# Altium PCB rightsuperior.PcbDoc
Units mil, origin at the board's own origin, x right, y up, seen from the top; angles counter-clockwise.
Board outline 1107.87 x 984.25 mil, 2 copper layers (Top Layer, Bottom Layer), stack 30.8 mil thick; 3 components, 6 nets, 47 pads, 14 vias.
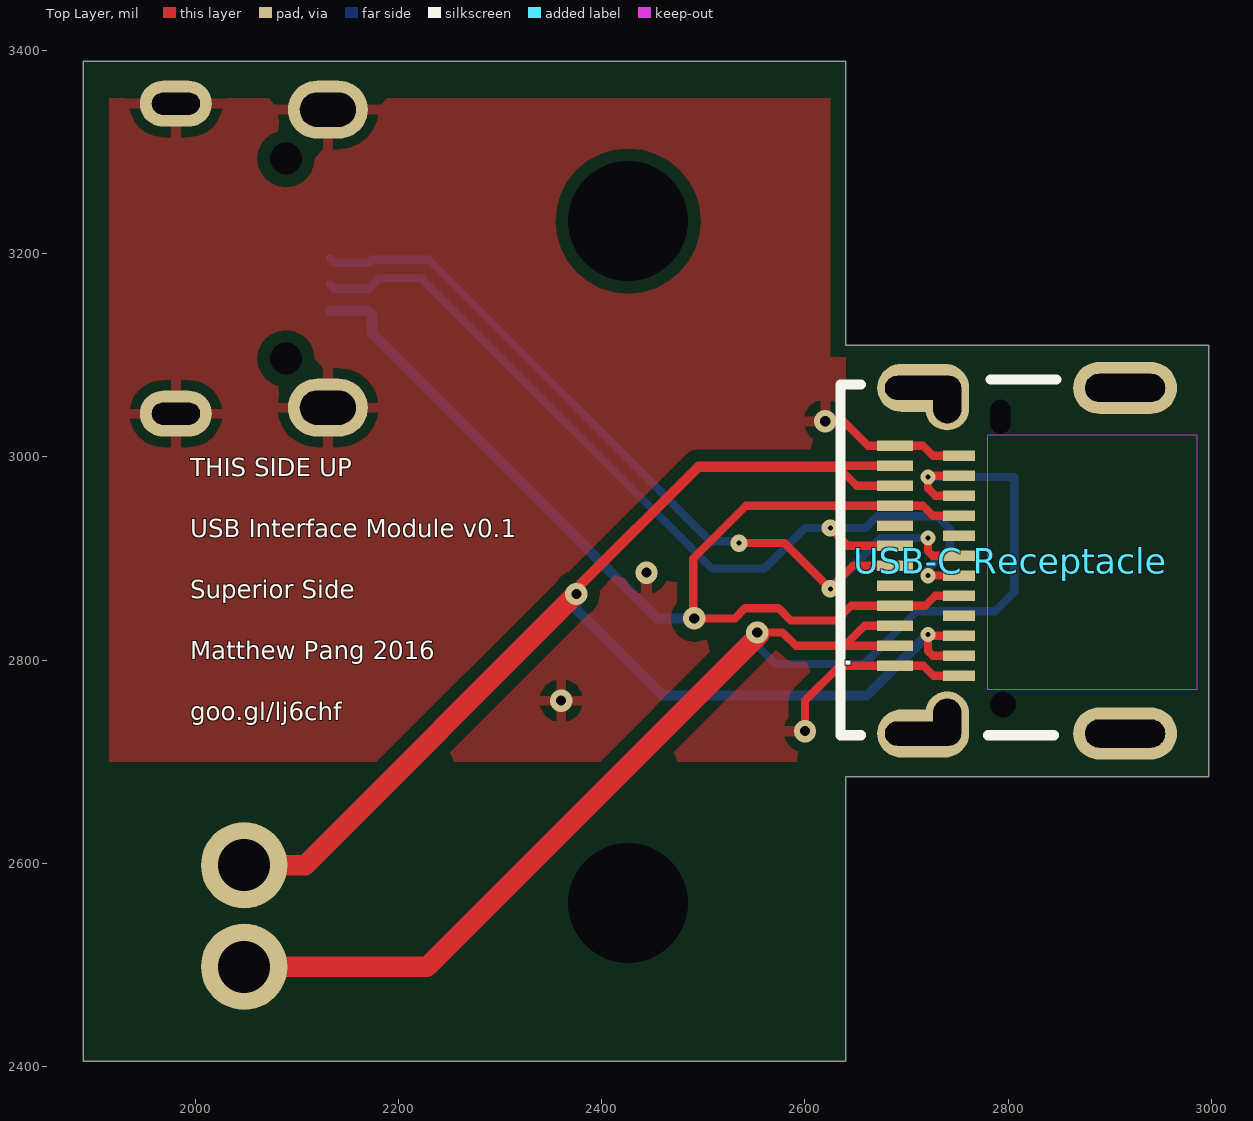
[diagram p0: Top Layer view]
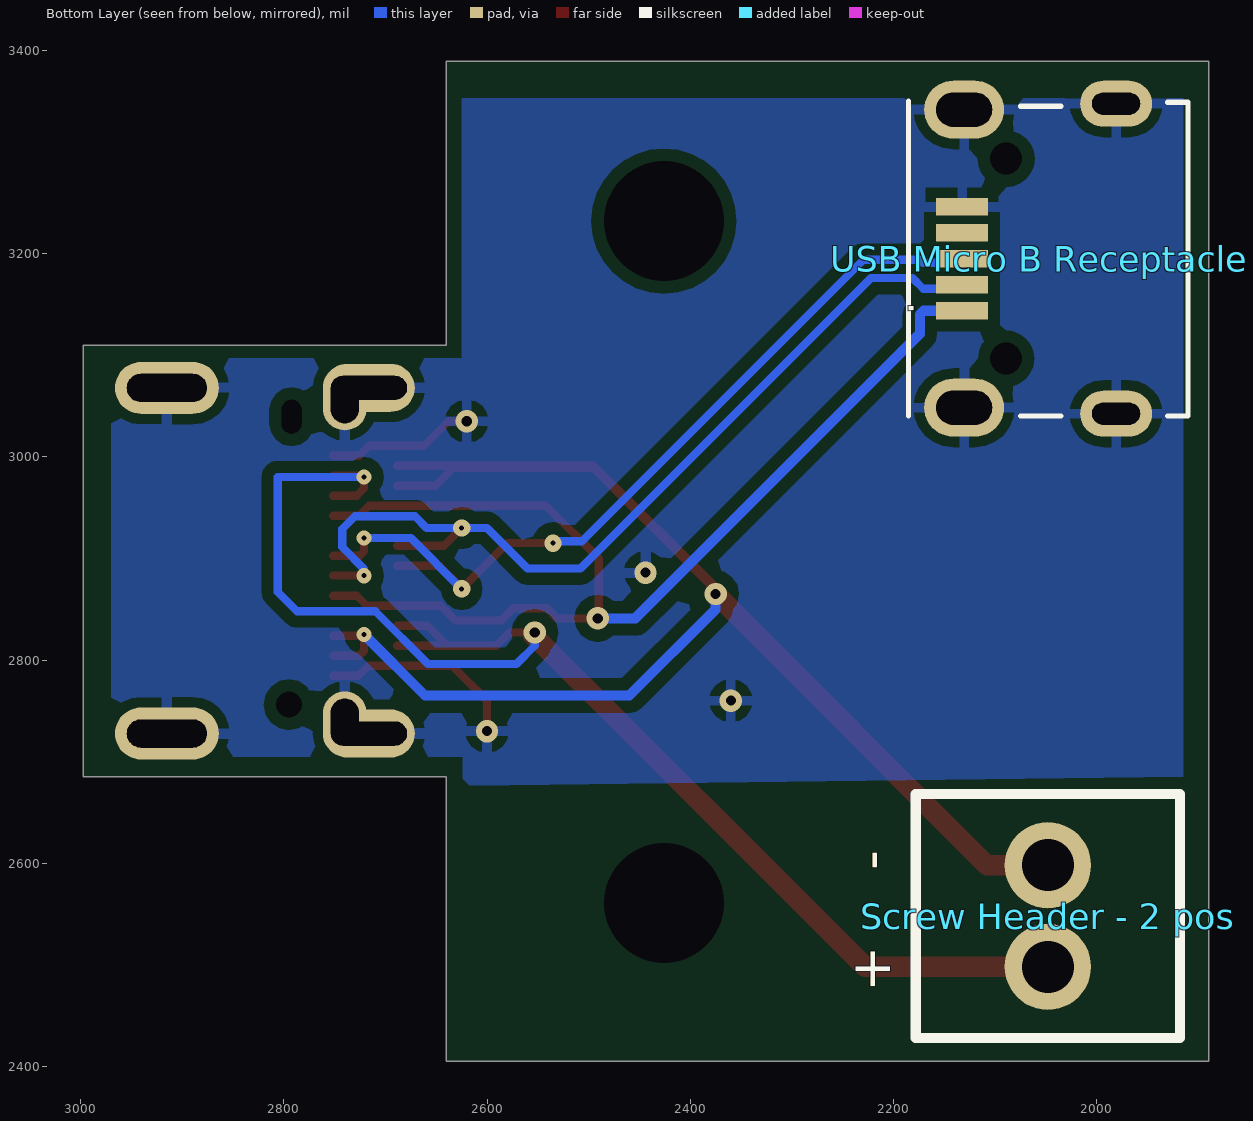
[diagram p1: Bottom Layer view, seen from below]

## Layer stack, top to bottom
Top Solder: solder mask 0.4, Solder Resist, Dk 3.5
Top Layer: signal copper 1.4
Dielectric 1: dielectric 28, FR-4, Dk 4.8
Bottom Layer: signal copper 1.4
Bottom Solder: solder mask 0.4, Solder Resist, Dk 3.5

## Board outline
1889.61,2405.12 1889.61,3389.37 2640,3389.37 2640,3110 2997.48,3110 2997.48,2685 2640,2685 2640,2405.12

## Design rules (kind name [scope] priority, off if disabled: settings)
BoardOutlineClearance [All] p1: gap=10
Clearance [All] p1: gap=7 except(4: Arc-Arc Arc-Track Arc-SMDPad Track-Track Track-SMDPad SMDPad-SMDPad; 8: Arc-THPad Track-THPad SMDPad-THPad THPad-THPad; 12: Arc-Poly Track-Poly SMDPad-Poly THPad-Poly Via-Poly Fill-Poly Poly-Poly)
ComponentClearance [All] p1 off: gap=1 collisioncheckmode=3 verticalgap=1 showdistances=TRUE
DiffPairsRouting [All] p1: maxlimit=10 minlimit=10 mostfreqgap=10 toplayer_minwidth=8 toplayer_maxwidth=15 toplayer_prefwidth=8 bottomlayer_minwidth=8 bottomlayer_maxwidth=15 bottomlayer_prefwidth=8 maxuncoupledlength=500
HoleSize [All] p1: absolutevalues=TRUE maxlimit=150 minlimit=3 maxpercent=80.000 minpercent=20.000
HoleToHoleClearance "Hole to Hole L Shaped Pad" [(InComponent('USB-C Receptacle') AND IsPad AND InNet('GND'))] p1: gap=0 allowstackedmicrovias=TRUE
HoleToHoleClearance [All] p2: gap=10 allowstackedmicrovias=TRUE
MinimumAnnularRing "Minimum Annular - Pad" [IsPad] p1: minimumring=7
MinimumAnnularRing [IsVia] p2: minimumring=5
MinimumSolderMaskSliver [All] p1: minsoldermaskwidth=3
PlaneClearance [All] p1: clearance=50
PolygonConnect [All] p1: connectstyle=Relief reliefconductorwidth=10 reliefentries=4 polygonreliefangle="90 Angle" airgapwidth=10
RoutingVias [All] p1: holewidth=10 width=20 viastyle="Through Hole" minholewidth=5 minwidth=15 maxholewidth=40 maxwidth=50
SilkToSilkClearance [All] p1: silktosilkclearance=4
SilkToSolderMaskClearance [IsPad] p1: minsilkscreentomaskgap=5 clearancetoexposedcopper=TRUE
SolderMaskExpansion SolderMaskExpansionUSBMICRO [(InComponent('USB Micro B Receptacle') AND InPadClass('All Pads'))] p1: expansion=2.5
SolderMaskExpansion [All] p2: expansion=3
Width [InNetClass('All Nets')] p1: maxlimit=30 minlimit=7 preferedwidth=8 minimp=50.000000 maximp=50.000000 favimp=50.000000
22 further rules are at their usual default settings.

## Classes and differential pairs
component class rightsuperior: "Screw Header - 2 pos" "USB Micro B Receptacle"
differential pair USB_D: +USB_D_P -USB_D_N

## Components (designator, comment, footprint, x,y, rotation, side; value= is the part's Value field where it differs from the comment)
"Screw Header - 2 pos" "Screw Header - 2 pos" "SCREW HEADER - 2POS" 2048,2498 r90 bottom
"USB Micro B Receptacle" "USB Micro B Receptacle" "USB MICRO B RECEPTACLE" 1910,3195 r90 bottom locked
"USB-C Receptacle" "USB-C Receptacle" "JAE USB RECEPTACLE" 2795,2756 r90 top locked

## Footprints (in the part's own frame and the unit in brackets; to place one, negate y for a bottom-side part, rotate by r counter-clockwise, add the part's x,y. Pads: shape width x height; smd on the part's side, far side on the other; paste and mask are expansions set on the pad)
"JAE USB RECEPTACLE" [mm] "JAE DX07S024JJ2R1300"
  rect 0.27x0.9 smd: A1(0.975,2.7) A2(1.475,2.7) A3(1.975,2.7) A4(2.475,2.7) A5(2.975,2.7) A6(3.475,2.7) A7(3.975,2.7) A8(4.475,2.7) A9(4.975,2.7) A10(5.475,2.7) A11(5.975,2.7) A12(6.475,2.7)
  rect 0.27x0.8 smd: B1(6.225,1.1) B2(5.725,1.1) B3(5.225,1.1) B4(4.725,1.1) B5(4.225,1.1) B6(3.725,1.1) B7(3.225,1.1) B8(2.225,1.1) B9(2.725,1.1) B10(1.725,1.1) B11(1.225,1.1) B12(0.725,1.1)
  round 0 hole 0.65 unplated: H1(0,0)
  round 0 hole 0.5 slot 0.85 at 0 deg unplated: H2(7.2,0.065)
  oval 1.2x2.3 hole 0.6 slot 1.9 at 90 deg: SHL_GND1(-0.72,2) SHL_GND3(7.92,2)
  oval 1.524x1.1 hole 0.7 slot 1.168 at 0 deg: SHL_GND1(-0.432,1.397) SHL_GND3(7.62,1.397)
  oval 1.3x2.6 hole 0.7 slot 2 at 90 deg: SHL_GND2(-0.72,-3.05) SHL_GND4(7.92,-3.05)
  Top Layer keep-out region: 0.381,-4.85 6.731,-4.85 6.731,0.4 0.381,0.4
  silkscreen extent -0.76,-1.33 8.13,4.06
"SCREW HEADER - 2POS" [mil] "On Shore Technology - OSTVN02A150"
  round 85 hole 51.18: N(100,0) P(0,0)
  silkscreen extent -70,-130 170,130
"USB MICRO B RECEPTACLE" [mm] "Wurth Electronics Inc - 629105150521"
  rect 0.432x1.3 smd: +5VBus(-1.3,5.65) USBDM(-0.65,5.65) USBDP(0,5.65) USBGND(1.3,5.65) USBID(0.65,5.65)
  round 0 hole 0.8 unplated: H1(-2.5,4.55) H2(2.5,4.55)
  oval 1.45x2 hole 0.85 slot 1.4 at 90 deg: SHL_GND1(-3.725,5.6) SHL_GND3(3.725,5.6)
  oval 1.15x1.8 hole 0.55 slot 1.2 at 90 deg: SHL_GND2(-3.875,1.8) SHL_GND4(3.875,1.8)
  silkscreen extent -3.94,0 3.94,6.98

## Part data
"Screw Header - 2 pos": "On Shore Technology - OSTVN02A150"
"USB Micro B Receptacle": "Wurth Electronics Inc - 629105150521"
"USB-C Receptacle": "JAE DX07S024JJ2R1300"

## Free pads (board coordinates)
  rect 0x0 hole 118.11 unplated: 1(2426,3232) 2(2426,2561)

## Via types
v1: diameter 22, hole 10, Top Layer to Bottom Layer, 7 vias
v2: diameter 15, hole 5, Top Layer to Bottom Layer, tented both sides, 4 vias
v3: diameter 17, hole 5, Top Layer to Bottom Layer, 3 vias

## Nets (pads, with @x,y where several pads share a name; then routed paths per layer and width w, separated by ;. In a path a pad name is that pad's centre, name@x,y a point inside that pad or via, vN(x,y) a via of type N, cw(c..) or ccw(c..) an arc to the next point about the centre after c; other vN are vias at no path point)
12V_GND: "Screw Header - 2 pos.N" "USB-C Receptacle.A10" "USB-C Receptacle.A11" "USB-C Receptacle.B10" "USB-C Receptacle.B11" | length 1370.1
  Top Layer w8: 2688.7,2971.55 2650.92,2971.55 2631.24,2991.24 2688.7,2991.24 ; v2(2721,2825) 2721,2809 2725.77,2804.23 2751.69,2804.23 ; v2@2722.09,2823.91 2751.69,2823.91
  Top Layer w10: v1(2375,2865) 2375,2870 2495.24,2990.24 2630.24,2990.24
  Top Layer w20: 2048,2598 2108,2598 v1(2375,2865)
  Bottom Layer w10: v1(2375,2865) 2375,2850 2460,2765 2661,2765 v2(2721,2825)
+5V: "USB Micro B Receptacle.+5VBus" "USB-C Receptacle.A4" "USB-C Receptacle.A9" "USB-C Receptacle.B4" "USB-C Receptacle.B9" | length 1120.2
  Top Layer w8: 2540.87,2950.87 2490,2900 2490,2842 v1(2491,2841) 2531,2841 2541,2851 2574,2851 2586,2839 2631,2839 2645.44,2853.44 2688.7,2853.44 2718.44,2853.44 2728.28,2863.28 2751.69,2863.28 ; 2541.87,2951.87 2688.7,2951.87 2716.13,2951.87 2725.98,2942.02 2751.69,2942.02
  Bottom Layer w10: 2132.44,3143.82 2170.18,3143.82 2174,3140 2174,3121 2454,2841 v1(2491,2841)
+12V: "Screw Header - 2 pos.P" "USB-C Receptacle.A2" "USB-C Receptacle.A3" "USB-C Receptacle.B2" "USB-C Receptacle.B3" | length 1419.2
  Top Layer w8: v1(2553,2827) 2578,2827 2591,2814 2639,2814 ; 2688.7,2814.07 2688.63,2814 2639,2814 ; 2688.7,2833.76 2658.76,2833.76 2639,2814 ; v2(2721,2980) 2721,2969 2728.29,2961.71 2751.69,2961.71 ; v2@2722.39,2981.39 2751.69,2981.39
  Top Layer w20: 2048,2498 2228,2498 2555,2825 v1(2553,2827)
  Bottom Layer w8: v1(2553,2827) 2553,2814 2571,2796 2658,2796 2710,2848 2787,2848 2806,2867 2806,2980 v2(2721,2980)
GND: "USB Micro B Receptacle.SHL_GND1" "USB Micro B Receptacle.SHL_GND2" "USB Micro B Receptacle.SHL_GND3" "USB Micro B Receptacle.SHL_GND4" "USB Micro B Receptacle.USBGND" "USB-C Receptacle.A1" "USB-C Receptacle.A12" "USB-C Receptacle.B1" "USB-C Receptacle.B12" "USB-C Receptacle.SHL_GND1" "USB-C Receptacle.SHL_GND2" "USB-C Receptacle.SHL_GND3" "USB-C Receptacle.SHL_GND4" | length 344.8
  Top Layer w8: v1(2600,2730) 2600,2760 2633.39,2793.39 ; v1(2620,3035) 2638,3035 2662.08,3010.92 2688.7,3010.92 2716.08,3010.92 2725.92,3001.08 2751.69,3001.08 2751.69,3001.5 ; 2634.39,2794.39 2688.7,2794.39 2716.61,2794.39 2726.46,2784.54 2751.69,2784.54
  other v1: 2360,2760 2444,2886
USB_D_N: "USB Micro B Receptacle.USBDM" "USB-C Receptacle.A7" "USB-C Receptacle.B7" | length 917.5
  Top Layer w8: v3(2625,2930) 2642.5,2912.5 2688.7,2912.5 ; v2(2721,2883) 2751.66,2883
  Bottom Layer w8: 2132.44,3169.41 2136.44,3165.41 2170.71,3165.41 2181.3,3176 2222.2,3176 2508.2,2890 2560,2890 2600,2930 v3(2625,2930) 2659.54,2930 2671.04,2941.5 2729.91,2941.5 2742.5,2928.91 2742.5,2911.09 2721,2889.59 v2(2721,2883)
USB_D_P: "USB Micro B Receptacle.USBDP" "USB-C Receptacle.A6" "USB-C Receptacle.B6" | length 867.5
  Top Layer w8: v3(2535,2915) 2580,2915 v3(2625,2870) ; v3@2625,2870.81 2647,2892.81 2688.7,2892.81 ; v2@2723,2922 v2(2721,2920) 2721,2907 2725.35,2902.65 2751.69,2902.65
  Bottom Layer w8: 2132.44,3195 2136.44,3191 2170.85,3191 2173.85,3194 2229.66,3194 2506.83,2916.83 2533.17,2916.83 v3(2535,2915) ; v3(2625,2870) 2675,2920 v2(2721,2920)
pads on no net: "USB Micro B Receptacle.H1" "USB Micro B Receptacle.H2" "USB Micro B Receptacle.USBID" "USB-C Receptacle.A5" "USB-C Receptacle.A8" "USB-C Receptacle.B5" "USB-C Receptacle.B8" "USB-C Receptacle.H1" "USB-C Receptacle.H2"

## Polygon pours and split planes (outlines as drawn)
GND on Top Layer "GNDBTM" (solid, remove dead copper, pour order 4): 1915,3353 1915,2700 2640,2700 2640,2948 2640,2997 2640,3061 2640,3098 2625,3098 2625,3353
GND on Bottom Layer "GNDBOT" (solid, remove dead copper, pour order 6): 1915,3353 2269,3353 2621,3353 2625,3353 2625,3342.65 2625,3100 2625,3097 2624,3097 2625,3097 2911,3097 2970,3097 2970,2705 2624,2705 2624,2727 2624,2676 1915,2685

## Silkscreen, mask and mechanical layers (free items; w line width, h text height)
Top Overlay:
  text "THIS SIDE UP /  / USB Interface Module v0.1 /  / Superior Side /  / Matthew Pang 2016 /  / goo.gl/lj6chf" at 1995,2735 h30
Mechanical 1:
  the board outline again, w1

## Text inside footprints (layer, text, board x,y; h text height)
"Screw Header - 2 pos": Bottom Overlay "+" at 2203,2473 h40 r270; Bottom Overlay "-" at 2203,2593 h40 r270